# EAGLE board netCPU2layer (EAGLE 6.3)
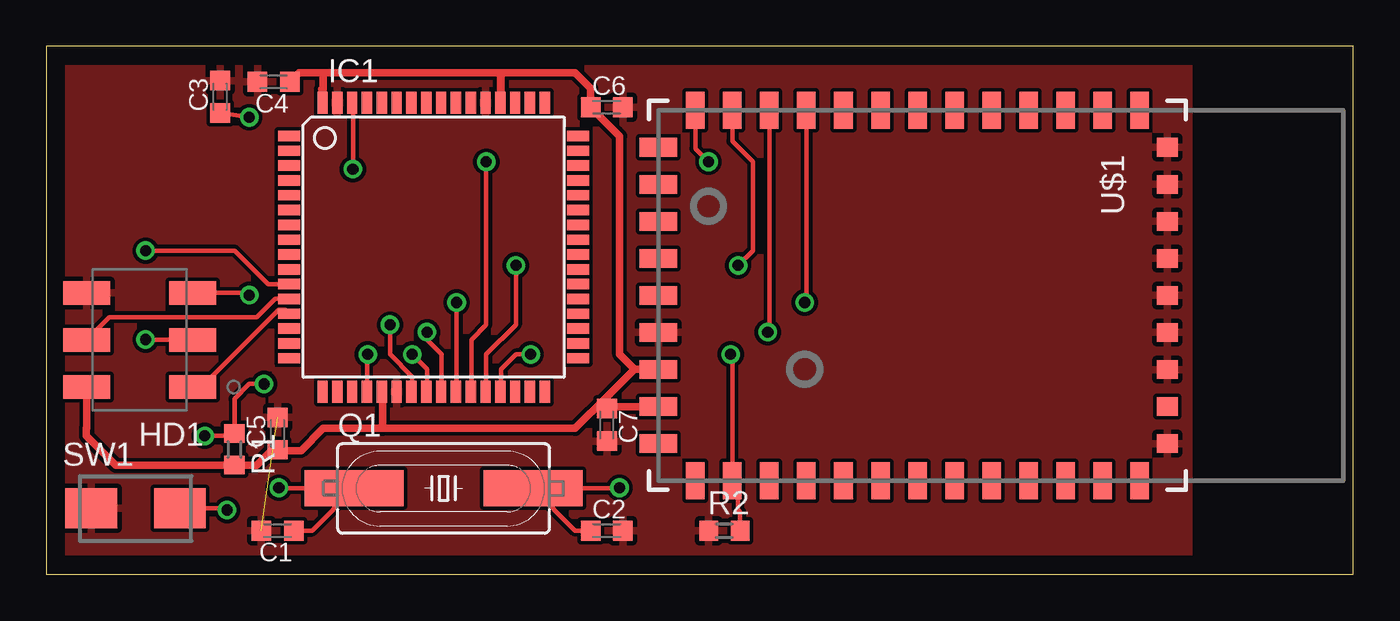
[diagram p0: board, top side]
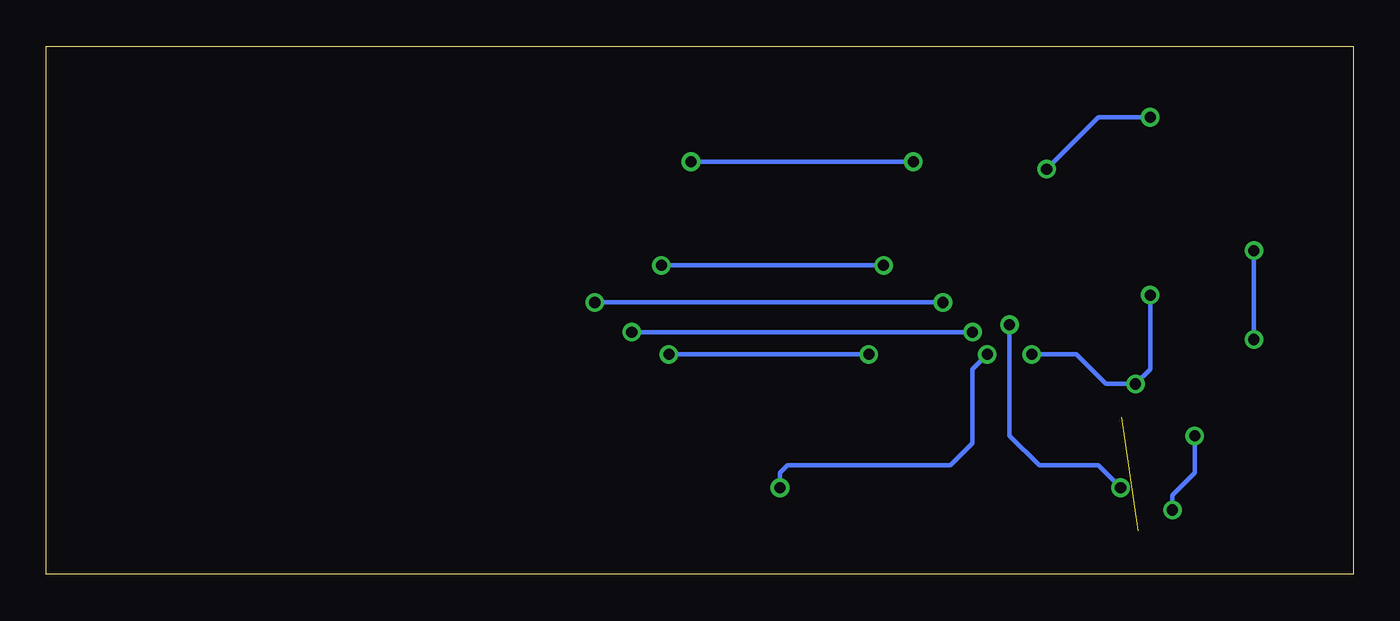
[diagram p1: board, bottom side, seen from below]

Size 70.58 x 28.51 mm. Coordinates in mm from the lower left corner, seen from the top.
Outline: 0,0 70.58,0 70.58,28.51 0,28.51 0,0
Copper layers (1*16): Top 0.035mm / dielectric 1.5mm / Bottom 0.035mm
Design rules "default": minimum track width 10mil, minimum drill 24mil, track to track 8mil, track to pad 8mil, pad to pad 8mil, via to via 8mil, smd to smd 8mil, copper to edge 40mil, drill to drill 8mil, minimum pad ring 10mil, minimum via ring 8mil, stop-mask expansion 4mil, vias tented up to drill 0mil, thermal gap 10mil

## Footprints (pad centres in the part's own frame; a part is rotated, then mirrored left to right if it is on the bottom)
C0603K = smd 1.05 x 1.08: 1 -0.875,0; 2 0.875,0
HEADER2X3 = smd 2.54 x 1.27: 1 -3.175,2.54; 2 2.54,2.54; 3 -3.175,0; 4 2.54,0; 5 -3.175,-2.54; 6 2.54,-2.54
TQFP64 = smd 1.194 x 0.559: 1 -7.8,6; 2 -7.8,5.2; 3 -7.8,4.4; 4 -7.8,3.6; 5 -7.8,2.8; 6 -7.8,2; 7 -7.8,1.2; 8 -7.8,0.4; 9 -7.8,-0.4; 10 -7.8,-1.2; 11 -7.8,-2; 12 -7.8,-2.8; 13 -7.8,-3.6; 14 -7.8,-4.4; 15 -7.8,-5.2; 16 -7.8,-6; 33 7.8,-6; 34 7.8,-5.2; 35 7.8,-4.4; 36 7.8,-3.6; 37 7.8,-2.8; 38 7.8,-2; 39 7.8,-1.2; 40 7.8,-0.4; 41 7.8,0.4; 42 7.8,1.2; 43 7.8,2; 44 7.8,2.8; 45 7.8,3.6; 46 7.8,4.4; 47 7.8,5.2; 48 7.8,6 | smd 0.559 x 1.194: 17 -6,-7.8; 18 -5.2,-7.8; 19 -4.4,-7.8; 20 -3.6,-7.8; 21 -2.8,-7.8; 22 -2,-7.8; 23 -1.2,-7.8; 24 -0.4,-7.8; 25 0.4,-7.8; 26 1.2,-7.8; 27 2,-7.8; 28 2.8,-7.8; 29 3.6,-7.8; 30 4.4,-7.8; 31 5.2,-7.8; 32 6,-7.8; 49 6,7.8; 50 5.2,7.8; 51 4.4,7.8; 52 3.6,7.8; 53 2.8,7.8; 54 2,7.8; 55 1.2,7.8; 56 0.4,7.8; 57 -0.4,7.8; 58 -1.2,7.8; 59 -2,7.8; 60 -2.8,7.8; 61 -3.6,7.8; 62 -4.4,7.8; 63 -5.2,7.8; 64 -6,7.8
HC49UP = smd 5.334 x 1.93: 1 -4.826,0; 2 4.826,0
R0603 = smd 1 x 1.1: 1 -0.85,0; 2 0.85,0
TAC-SWITCH = smd 2.8 x 2.16: 1 1.4,1.08; 2 6.2,1.08
RN-131G = smd 2 x 1: P$1 -10,11; P$2 -10,9; P$3 -10,7; P$4 -10,5; P$5 -10,3; P$6 -10,1; P$7 -10,-1; P$8 -10,-3; P$9 -10,-5; P$10 -10,-7; P$11 -10,-9; P$12 -10,-11; P$13 -10,-13; P$23 10,-13; P$24 10,-11; P$25 10,-9; P$26 10,-7; P$27 10,-5; P$28 10,-3; P$29 10,-1; P$30 10,1; P$31 10,3; P$32 10,5; P$33 10,7; P$34 10,9; P$35 10,11 | smd 1 x 2: P$14 -8,-15; P$15 -6,-15; P$16 -4,-15; P$17 -2,-15; P$18 0,-15; P$19 2,-15; P$20 4,-15; P$21 6,-15; P$22 8,-15 | smd 1 x 1.11: P$36 8,12.492; P$37 6,12.492; P$38 4,12.492; P$39 2,12.492; P$40 0,12.492; P$41 -2,12.492; P$42 -4,12.492; P$43 -6,12.492; P$44 -8,12.492

## Placement (x,y rotation side)
C1  18pF  [C0603K]  12.49,2.36 180 top
C2  18pF  [C0603K]  30.27,2.36 0 top
C3  0.1uF  [C0603K]  9.38,25.79 90 top
C4  0.1uF  [C0603K]  12.28,26.58 180 top
C5  0.1uF  [C0603K]  12.49,7.61 90 top
C6  0.1uF  [C0603K]  30.27,25.22 0 top
C7  0.1uF  [C0603K]  30.27,8.07 270 top
HD1  HEADER2X3  [HEADER2X3]  4.72,12.66 180 top
IC1  AT90USB1287-AU  [TQFP64]  20.92,17.67 0 top
Q1  8 MHz  [HC49UP]  21.45,4.64 0 top
R1  47k  [R0603]  10.16,6.75 270 top
R2  47k  [R0603]  36.62,2.36 0 top
SW1  [TAC-SWITCH]  1.02,2.48 0 top
U$1  RN-131G  [RN-131G]  48.05,15.06 270 top

## Library data of the parts
C1-C7 = rcl
HD1 SW1 = jkf-parts
IC1 = at90usb
Q1 = crystal; OC_FARNELL: unknown; OC_NEWARK: unknown
R1 R2 = resistor
U$1 = SparkFun-RF

## Nets
GND: C1.2 C2.2 C3.2 C4.2 C5.2 C6.2 C7.2 HD1.6 IC1.22 IC1.53 IC1.63 R2.1 SW1.1 U$1.P$19 U$1.P$36 U$1.P$38 U$1.P$39 U$1.P$40 U$1.P$41 U$1.P$42 U$1.P$43 U$1.P$44
N$1: C1.1 IC1.23 Q1.1
N$2: C2.1 IC1.24 Q1.2
N$3: HD1.1 IC1.13
N$4: HD1.5 IC1.20 R1.1 SW1.2
N$5: HD1.4 IC1.12
N$6: IC1.28 U$1.P$12
N$7: HD1.3 IC1.11
N$8: C3.1 IC1.62
N$9: IC1.27 U$1.P$13
N$10: IC1.26 U$1.P$10
N$11: IC1.25 U$1.P$11
N$13: IC1.29 R2.2 U$1.P$24
UCAP: IC1.7
UGND: IC1.6
UVCC: IC1.3
VBUS: IC1.8
VCC: C4.1 C5.1 C6.1 C7.1 HD1.2 IC1.21 IC1.52 IC1.64 R1.2 U$1.P$20 U$1.P$21

## Tracks (layer width: path | path; a pad name or v marks a point on that pad's centre or on a via)
GND  (1 unrouted)
  pour Top: 0.08,28.04 61.69,28.04 61.69,0.44 0.08,0.44
N$1  (via drill 0.6 pad 0.25)
  Top 0.254: C1.1 14.34,2.36 Q1.1 12.59,4.64 v12.56,4.68 | v18.56,13.48 18.56,11.88 19.76,10.68 19.76,9.91 IC1.23
  Bottom 0.254: v12.56,4.68 13.76,5.88 16.96,5.88 18.56,7.48 v18.56,13.48
N$2  (via drill 0.6 pad 0.25)
  Top 0.254: C2.1 28.57,2.36 Q1.2 | Q1.2 26.2,4.64 | Q1.2 30.93,4.64 v30.96,4.68 | v19.76,11.88 20.56,11.08 20.56,9.91 IC1.24
  Bottom 0.254: v30.96,4.68 30.96,5.48 30.56,5.88 21.76,5.88 20.56,7.08 20.56,11.08 v19.76,11.88
N$3
  Top 0.254: HD1.1 8.4,10.12 12.56,14.28 12.91,14.28 IC1.13
N$4  (via drill 0.6 pad 0.25)
  Top 0.254: IC1.20 17.32,11.84 v17.36,11.88 | v11.76,10.28 10.96,10.28 10.16,9.48 R1.1 10.05,7.48 v8.56,7.48 | SW1.2 9.68,3.56 v9.76,3.48 | HD1.5 10.84,15.2 v10.96,15.08
  Bottom 0.254: v17.36,11.88 14.96,11.88 13.36,10.28 v11.76,10.28 10.96,11.08 v10.96,15.08 | v9.76,3.48 9.76,4.28 8.56,5.48 v8.56,7.48
N$5
  Top 0.254: IC1.12 12.35,14.87 11.36,13.88 3.4,13.88 HD1.4
N$6  (via drill 0.6 pad 0.25)
  Top 0.254: U$1.P$12 37.05,23.39 38.16,22.28 38.16,17.48 v37.36,16.68 | v25.36,16.68 25.36,13.48 23.76,11.88 23.76,9.91 IC1.28
  Bottom 0.254: v37.36,16.68 v25.36,16.68
N$7  (via drill 0.6 pad 0.25)
  Top 0.254: IC1.11 11.97,15.67 10.16,17.48 v5.36,17.48 | v5.36,12.68 7.88,12.68 HD1.3
  Bottom 0.254: v5.36,17.48 v5.36,12.68
N$8  (via drill 0.6 pad 0.25)
  Top 0.254: C3.1 v10.96,24.68 | v16.56,21.88 16.56,25.43 IC1.62
  Bottom 0.254: v10.96,24.68 13.76,24.68 v16.56,21.88
N$9  (via drill 0.6 pad 0.25)
  Top 0.254: U$1.P$13 35.05,22.99 v35.76,22.28 | v23.76,22.28 23.76,13.48 22.96,12.68 22.96,9.91 IC1.27
  Bottom 0.254: v35.76,22.28 v23.76,22.28
N$10  (via drill 0.6 pad 0.25)
  Top 0.254: U$1.P$10 41.05,14.77 v40.96,14.68 | v22.16,14.68 22.16,9.91 IC1.26
  Bottom 0.254: v40.96,14.68 v22.16,14.68
N$11  (via drill 0.6 pad 0.25)
  Top 0.254: U$1.P$11 39.05,13.17 v38.96,13.08 | v20.56,13.08 20.56,12.68 21.36,11.88 21.36,9.91 IC1.25
  Bottom 0.254: v38.96,13.08 v20.56,13.08
N$13  (via drill 0.6 pad 0.25)
  Top 0.254: v36.96,11.88 37.05,11.79 U$1.P$24 37.36,4.75 37.36,3.48 37.47,3.37 R2.2 | v26.16,11.88 25.36,11.88 24.56,11.08 24.56,9.91 IC1.29
  Bottom 0.254: v36.96,11.88 v26.16,11.88
VCC
  Top 0.254: 2.18,7.9 2.16,7.88 | 10.15,5.88 R1.2
  Top 0.406: 30.27,9.06 C7.1 | U$1.P$21 30.38,9.06 C7.1 | C7.1 30.27,9.59 | 30.27,9.59 31.76,11.08 | 31.76,11.08 33.03,11.08 U$1.P$20 | 31.76,11.08 30.96,11.88 30.96,23.65 C6.1 29.4,26.25 28.56,27.08 24.56,27.08 | 24.56,27.08 24.56,25.51 IC1.52 24.52,27.04 24.56,27.08 | 24.56,27.08 14.96,27.08 | 14.96,27.08 14.96,26.28 | 14.96,26.28 14.96,25.51 IC1.64 | 14.87,26.18 14.96,26.28 | 14.96,27.08 13.65,27.08 C4.1 | 30.27,9.59 28.56,7.88 18.16,7.88 | 18.16,7.88 18.16,9.83 IC1.21 | 18.16,7.88 14.96,7.88 13.76,6.68 12.54,6.68 C5.1 12.21,6.73 11.36,5.88 10.19,5.88 R1.2 | HD1.2 2.18,7.9 | 2.16,7.88 2.16,7.48 3.76,5.88 10.15,5.88